# Altium PCB Filter.PcbDoc
Units mm, origin at the board's own origin, x right, y up, seen from the top; angles counter-clockwise.
Board outline 44 x 25 mm, 2 copper layers (Top Layer, Bottom Layer); 40 components, 42 nets, 92 pads, 31 vias.
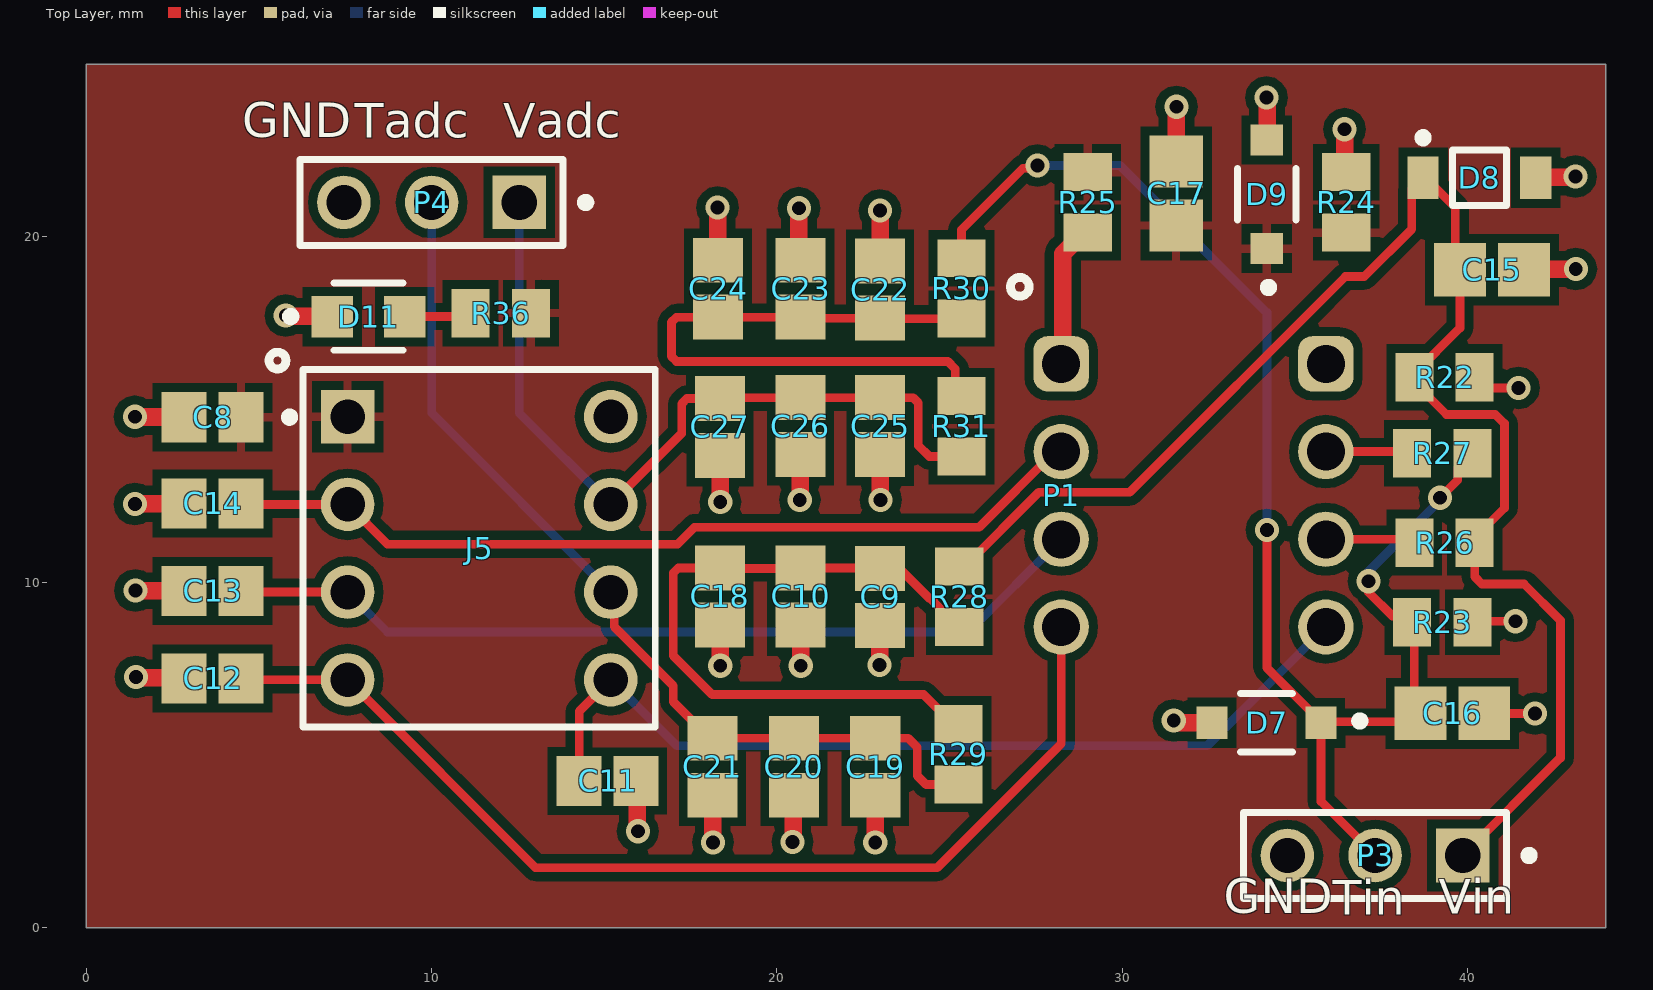
[diagram p0: Top Layer view]
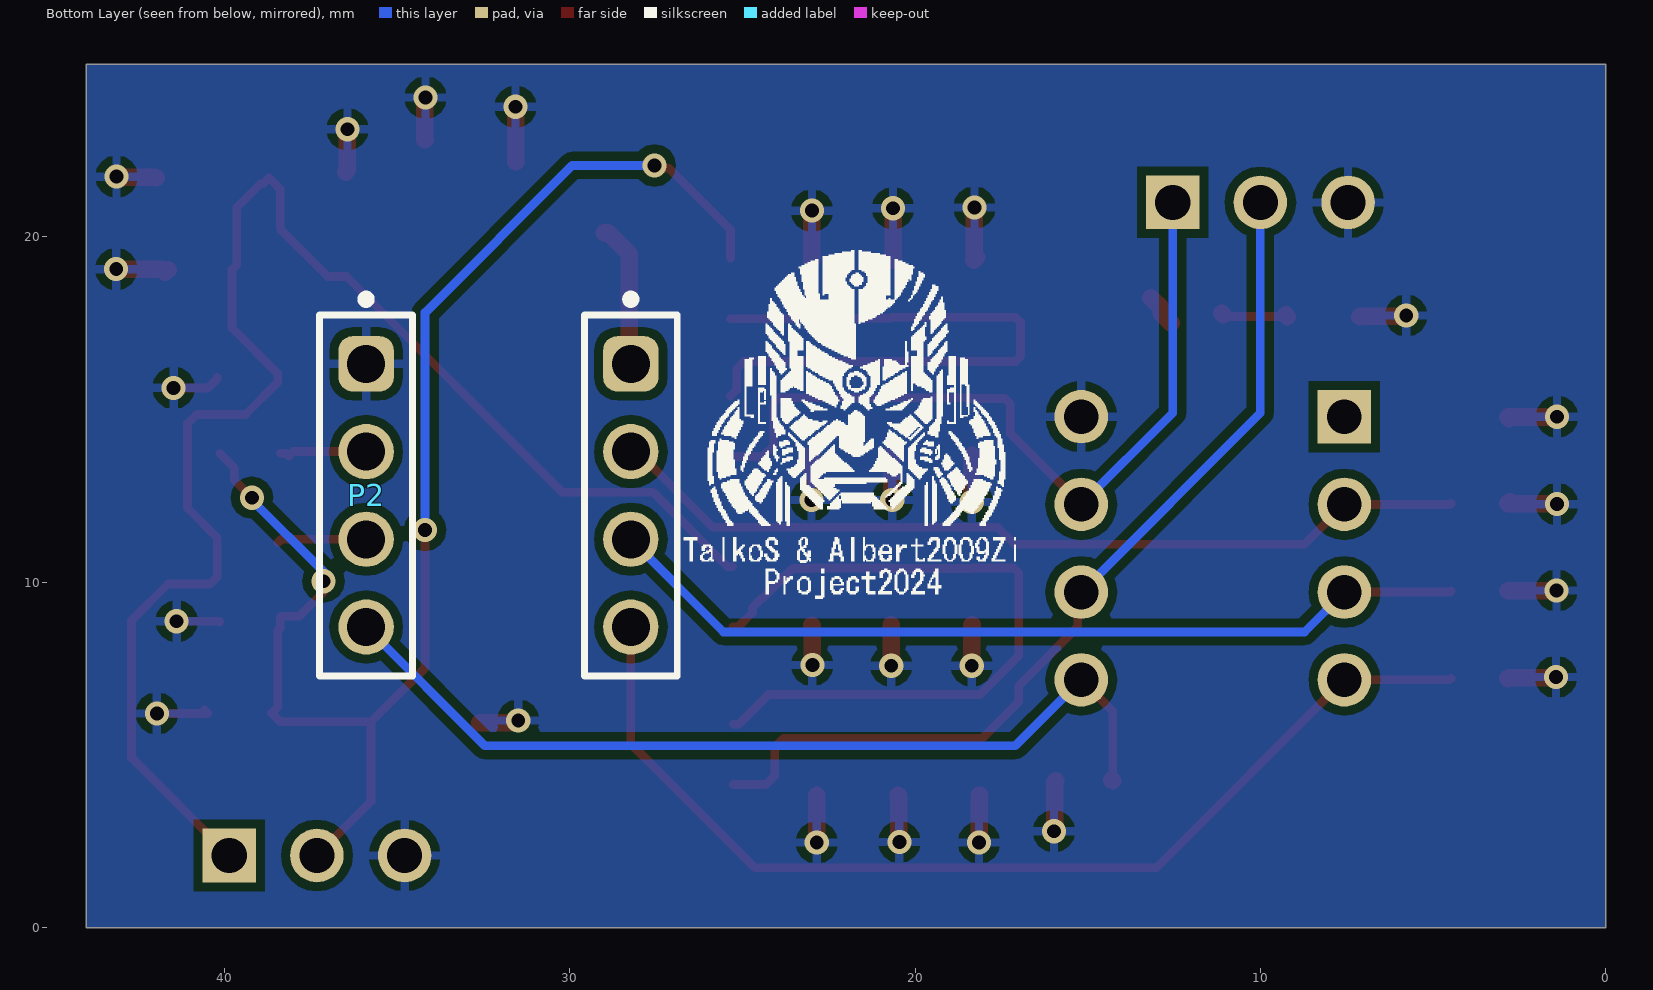
[diagram p1: Bottom Layer view, seen from below]

## Layer stack, top to bottom
Top Solder: solder mask 0.0102, Solder Resist, Dk 3.5
Top Layer: signal copper 0.0356
Dielectric 1: dielectric 0.32, FR-4, Dk 4.8
Bottom Layer: signal copper 0.0356
Bottom Solder: solder mask 0.0102, Solder Resist, Dk 3.5

## Board outline
0,0 0,25 44,25 44,0

## Design rules (kind name [scope] priority, off if disabled: settings)
Clearance [All] p1: gap=0.254 ignorepadtopadclearanceinfootprint=FALSE except(0: Arc-Hole Track-Hole SMDPad-Hole THPad-Hole Via-Hole Fill-Hole Poly-Hole Region-Hole Text-Hole)
MinimumSolderMaskSliver [All] p1: minsoldermaskwidth=0.1
PolygonConnect [All] p1: connectstyle=Relief reliefconductorwidth=0.254 reliefentries=4 polygonreliefangle="90 Angle" airgapwidth=0.254
RoutingVias [All] p1: holewidth=0.711 width=1.27 viastyle="Through Hole" minholewidth=0.4 minwidth=0.7 maxholewidth=0.711 maxwidth=1.27
SilkToSilkClearance [All] p1: silktosilkclearance=0.2
SolderMaskExpansion [All] p1: expansion=0.102 istentingtop=FALSE
Width [All] p1: maxlimit=2 minlimit=0.254 preferedwidth=0.508
28 further rules are at their usual default settings.

## Classes and differential pairs
component class power: C1 C2 C3 C4 C5 D1 D2 D3 D4 IC1 J1 R1 R2 R3
component class uCCtrl: C6 C7 D5 D6 J2 LS1 Q1 Q2 Q3 Q4 Q5 R4 R5 R6 R7 R8 R9 R10 R11 R12 R13 R14 R15 R16 R17 R18 R19 R20 R21 U1 VR1

## Components (designator, comment, footprint, x,y, rotation, side; value= is the part's Value field where it differs from the comment)
C8 "100nF/50V" CAPC2013X145X48NL20T23 3.657,14.779 r0 top
C9 "10uF/16V" CAPC2013X145X48NL20T23 22.99,9.577 r90 top
C10 "1uF/16V" CAPC2013X145X48NL20T23 20.684,9.591 r90 top
C11 "100nF/50V" CAPC2013X145X48NL20T23 15.098,4.25 r0 top
C12 "100nF/50V" CAPC2013X145X48NL20T23 3.657,7.216 r180 top locked
C13 "100nF/50V" CAPC2013X145X48NL20T23 3.657,9.749 r180 top
C14 "100nF/50V" CAPC2013X145X48NL20T23 3.657,12.283 r180 top
C15 "1nF" CAPC2013X145X48ML20T23 40.707,19.055 r180 top
C16 "1nF" CAPC2013X145X48ML20T23 39.559,6.209 r180 top
C17 "1nF" CAPC2013X145X48ML20T23 31.558,21.259 r270 top
C18 "100nF/16V" CAPC2013X145X48NL20T23 18.348,9.592 r90 top
C19 "10uF/16V" CAPC2013X145X48NL20T23 22.847,4.658 r90 top
C20 "1uF/16V" CAPC2013X145X48NL20T23 20.489,4.658 r90 top
C21 "100nF/16V" CAPC2013X145X48NL20T23 18.132,4.658 r90 top
C22 "10uF/16V" CAPC2013X145X48NL20T23 22.99,18.475 r270 top
C23 "1uF/16V" CAPC2013X145X48NL20T23 20.685,18.502 r270 top
C24 "100nF/16V" CAPC2013X145X48NL20T23 18.298,18.502 r270 top
C25 "10uF/16V" CAPC2013X145X48NL20T23 22.99,14.521 r90 top
C26 "1uF/16V" CAPC2013X145X48NL20T23 20.682,14.521 r90 top
C27 "100nF/16V" CAPC2013X145X48NL20T23 18.348,14.498 r90 top
D7 "BZT52C5V1-7-F" FP-SOD123-MFG 34.18,5.934 r180 top
D8 "MMSZ4678T1G" ONSC-SOD-123-2-425-04_V 40.346,21.714 r0 top
D9 "BZT52C5V1-7-F" FP-SOD123-MFG 34.187,21.238 r90 top
D11 "Device ON" FP-LS_R976-MFG 8.169,17.696 r0 top
J5 "1-2199298-2" FP-1-2199298-2-MFG 11.376,10.986 r270 top
P1 "61300411121" 61300411121 28.231,12.516 r270 top
P2 "61300411121" 61300411121 35.897,12.516 r270 bottom
P3 "22-28-4033" MOLX-22-28-4033_V 37.322,2.088 r180 top
P4 "22-28-4033" MOLX-22-28-4033_V 10,21 r180 top
R22 "100K" RESC2013X55X40NL15T20 39.333,15.941 r180 top
R23 "100K" RESC2013X55X40NL15T20 39.262,8.842 r180 top
R24 "100K" RESC2013X55X40NL15T20 36.492,21 r270 top
R25 "0R" RESC2013X55X40NL15T20 29.004,21 r270 top
R26 "0R" RESC2013X55X40NL15T20 39.333,11.142 r180 top
R27 "0R" RESC2013X55X40NL15T20 39.262,13.737 r180 top
R28 "0R" RESC2013X55X40NL15T20 25.282,9.577 r90 top
R29 "0R" RESC2013X55X40NL15T20 25.256,5.015 r90 top
R30 "0R" RESC2013X55X40NL15T20 25.344,18.509 r90 top
R31 "0R" RESC2013X55X40NL15T20 25.344,14.521 r90 top
R36 "360R" RESC2013X55X40NL15T20 11.999,17.796 r0 top

## Footprints (in the part's own frame and the unit in brackets; to place one, negate y for a bottom-side part, rotate by r counter-clockwise, add the part's x,y. Pads: shape width x height; smd on the part's side, far side on the other; paste and mask are expansions set on the pad)
61300411121 [mm] "Pin Header, pitch 2.54 mm, THT, Vertical, single row, 4p"
  rrect50% 1.6x1.6 hole 1.1: 1(-3.81,0)
  round 1.6 hole 1.1: 2(-1.27,0) 3(1.27,0) 4(3.81,0)
  body extent -5.08,-1.27 5.08,1.27, height 8.57
CAPC2013X145X48ML20T23 [mm] "Chip Capacitor, 2-Leads, Body 2.00x1.25mm, IPC Low Density"
  rect 1.5x1.55 smd: 1(-0.925,0) 2(0.925,0)
  body extent -1.1,-0.72 1.1,0.72, height 1.45
CAPC2013X145X48NL20T23 [mm] "Chip Capacitor, 2-Leads, Body 2.00x1.25mm, IPC Medium Density"
  rect 1.3x1.45 smd: 1(-0.825,0) 2(0.825,0)
  body extent -1.1,-0.72 1.1,0.72, height 1.45
FP-1-2199298-2-MFG [mm]
  rect 1.55x1.55 hole 1 paste-1000 mask+0: 1(-3.81,-3.81)
  round 1.55 hole 1 paste-1000 mask+0: 2(-1.27,-3.81) 3(1.27,-3.81) 4(3.81,-3.81) 5(3.81,3.81) 6(1.27,3.81) 7(-1.27,3.81) 8(-3.81,3.81)
  silkscreen extent -5.18,-5.61 5.18,5.1, body extent -5.28,-5.2 5.28,5.2, height 0.25
FP-LS_R976-MFG [mm]
  rect 1.2x1.2 smd paste+0 mask+0: 1(-1.05,0) 2(1.05,0)
  silkscreen extent -2.37,-0.97 1,0.97, body extent -1.75,-0.8 1.75,0.8, height 0.25
FP-SOD123-MFG [mm]
  rect 0.9x0.95 smd paste+0 mask+0: 1(-1.575,0) 2(1.575,0)
  silkscreen extent -2.83,-0.85 0.75,0.85, body extent -2.12,-0.95 2.12,0.95, height 0.25
MOLX-22-28-4033_V [mm] "THD, 3-Leads, Body 7.62x2.49mm, Pitch 2.54mm"
  rect 1.55x1.55 hole 1.02: 1(-2.54,0)
  round 1.55 hole 1.02: 2(0,0) 3(2.54,0)
  silkscreen extent -4.59,-1.24 3.81,1.24, body extent -3.81,-1.24 3.81,1.24, height 8.38
ONSC-SOD-123-2-425-04_V [mm] "SOD, 2-Leads, Body 2.69x1.6mm"
  rect 0.91x1.22 smd: 1(-1.635,0) 2(1.635,0)
  silkscreen extent -1.76,-0.8 0.78,1.28, body extent -1.35,-0.8 1.35,0.8, height 1.35
RESC2013X55X40NL15T20 [mm] "Chip Resistor, 2-Leads, Body 2.00x1.25mm, IPC Medium Density"
  rect 1.1x1.4 smd: 1(-0.875,0) 2(0.875,0)
  body extent -1.07,-0.7 1.08,0.7, height 0.55

## Part data
C8 C9 C10 C11 C12 C13 C14 C18 C19 C20 C21 C22 C23 C24 C25 C26 C27: library part CMP-2007-03167-1, Manufacturer=Vitramon, Part Number=VJ0805Y104KNAAT
C15 C16 C17: library part CMP-2007-03154-1, Manufacturer=Vitramon, Part Number=VJ0805Y102KXAMC
D7 D9: library part CMP-2000-05976-2, "DIODE ZENER 5.1V 500MW SOD123", Forward Current=10mA, Manufacturer="Diodes Incorporated", Max Junction Temp=+150°C, Max Reverse Leakage Current=2uA, Max Zener Voltage=5.4V, Nom Zener Voltage=5.1V, Package=SOD123, Power Dissipation=370mW, Temperature="-65°C to +150°C", Temperature Range Low=-65°C, Automotive=No, Automotive Grade=NA, Category=Diode, ComponentLink2Description=Datasheet, ComponentLink2URL=https://www.diodes.com/assets/Datasheets/ds18004.pdf, Device Class L1="Discrete Semiconductors", Device Class L2=Diodes, Device Class L3="Zener Diodes", Digikey Description="DIODE ZENER 5.1V 500MW SOD123", Footprint Url=https://www.diodes.com/assets/Package-Files/SOD123.pdf, Height=1.45mm, Lead Free=Yes, Manufacturer Part Number=BZT52C5V1-7-F, Mouser Description="Zener Diodes 5.1V 500mW", Octopart=https://octopart.com/bzt52c5v1-7-f-diodes+inc.-326718, RoHS=TRUE, Standoff Height=0mm, Temperature Range High=+150°C, Zener Impedance=60Ω
D8: library part CMP-1060-00511-1, "Zener Voltage Regulator, 500 mW, 2-Pin SOD-123, Pb-Free, Tape and Reel", Manufacturer="On Semiconductor", ComponentLink1Description="Manufacturer URL", ComponentLink1URL=http://www.onsemi.com/, ComponentLink2Description=Datasheet, ComponentLink2URL=http://www.onsemi.com/pub_link/Collateral/MMSZ4678T1-D.PDF, ComponentLink3Description="Package Specification", ComponentLink3URL=http://www.onsemi.com/pub_link/Collateral/425-04.PDF, DatasheetVersion="Rev. 9", Mounting Technology="Surface Mount", P Max (W)=0.5, PackageDescription="2-Pin SOD, Body 1.6 x 2.69 mm", PackageReference=SOD-123-2-425-04, PackageVersion="Rev. G, 10/2009", Packing="Tape and Reel", PartNumber=MMSZ4678T1G, RoHS=Pb-Free, VZ Typ (V)=1.8
D11: library part CMP-62016-000037-1, "LED RED DIFFUSED 0805 SMD", Case Code (Imperial)=0805, Case Code (Metric)=2012, Color=Red, Forward Current=25mA, Forward Voltage=2.5V, Lens Color=White, Max Operating Temperature=85°C, Min Operating Temperature=-30°C, Package Quantity=16000, Power Dissipation=65W, Reverse Voltage=12V, Test Current=20mA, Case/Package=0805, Depth=1.35mm, Dominant Wavelength=633nm, Height=0.9mm, Illumination Color=Red, Length=2mm, Lens Size=1.25mm, Lens Style=Flat, Lens Transparency=Diffused, Luminous Flux=0.47lm, Luminous Intensity=180mcd, Mount="Surface Mount", Number of Elements=1, Number of LEDs=1, Number of Pins=2, Packaging="Tape and Reel", Radiation Hardening=No, Viewing Angle=160°, Width=1.25mm
J5: library part CMP-03370-000009-1, "CONN IC DIP SOCKET 8POS TIN", Color=Black, Contact Current Rating=1A, Contact Resistance=20mR, Flammability Rating="UL94 V-0", Insulation Resistance=1GR, Max Operating Temperature=105°C, Min Operating Temperature=-40°C, Package Quantity=60, Connector Type=Pin, Contact Finish - Mating=TIN, Contact Material=Bronze, Contact Plating=Tin, Contact Post Length=3inch, ELV=Compliant, Housing Material=PBT, Lead Free="Lead Free", Lead Pitch=2.54mm, Length=0.4inch, Mating Alignment="Yes (With)", Mount="Through Hole", Number of Contacts=8, Number of Positions=8, Number of Rows=2, Orientation=Straight, Packaging=Rail/Tube, Pitch=2.54mm, Radiation Hardening=No, RoHS Compliant=Yes, Row Spacing=0.3inch, Series="Diplomate DL", Termination="Through Hole"
P1 P2: library part CMP-1502-01064-3, Color=Black, Contact Resistance=20mΩ, Current Rating=3A, Max Operating Temperature=105°C, Min Operating Temperature=-40°C, Operating Supply Voltage=250V, Connector Type="Male Pin", Contact Material=Copper, Contact Mating Length=5.9944mm, Contact Plating=Gold, Gender=Male, Height=8.89mm, Lead Free="Lead Free", Lead Pitch=2.54mm, Mount="Through Hole", NexarPartId=32855522, Number of Contacts=4, Number of Pins=4, Number of Positions=4, Number of Rows=1, Orientation=Vertical, Packaging=Bulk, Pitch=2.54mm, REACH SVHC=Unknown, RoHS=Compliant, Termination=Solder, Voltage Rating=250V
P3 P4: library part CMP-1676-00001-5, "Male Header, Pitch 2.54 mm, 1 x 3 Position, Height 8.38 mm, Tail Length 3.18 mm, RoHS, Bulk", Colour=Black, Current Rating="4 A", Manufacturer=Molex, Max Operating Temperature="75 degC", Min Operating Temperature="0 degC", Package Quantity=1, Voltage Rating="250 V", ComponentLink1Description="Manufacturer URL", ComponentLink1URL=http://www.molex.com/, ComponentLink2Description=Datasheet, ComponentLink2URL=http://www.molex.com/pdm_docs/sd/022284033_sd.pdf, Contact Finish=Gold, Contact Material=Brass, Contact Plating=Gold, DatasheetVersion="Rev. G, 01/2012", Height="8.38 mm", Lead Pitch="0.1 inch", Length="7.62 mm", Mount="Through Hole", Mounting Technology="Through Hole", PackageDescription="Male Header, Pitch 2.54 mm, 1 x 3 Position, Height 8.38 mm, Tail Length 3.18 mm", PackageReference=22-28-4033, Packaging=Bulk, Pins=3, REACH SVHC=Unknown, RoHSCompliant=true, Rows=1
R22 R23 R24 R25 R26 R27 R28 R29 R30 R31 R36: library part CMP-2001-04755-1, Manufacturer="Vishay Dale", Part Number=TNPW08052K00BEEN

## Via types
v1: diameter 0.7, hole 0.4, Top Layer to Bottom Layer, 31 vias

## Nets (pads, with @x,y where several pads share a name; then routed paths per layer and width w, separated by ;. In a path a pad name is that pad's centre, name@x,y a point inside that pad or via, vN(x,y) a via of type N, cw(c..) or ccw(c..) an arc to the next point about the centre after c; other vN are vias at no path point)
+5V: 
+5V_Device: P1.1 R25.2 | length 4.2
  Top Layer w0.508: P1.1 28.273,16.368 28.273,19.519 28.879,20.125 R25.2
+5V_Device_P: C8.2 C17.2 D9.1 J5.1 R24.2 R25.1 R36.2 | length 1
  Top Layer w0.508: R36.2@12.578,17.5 R36.2 12.874,17.946 R36.2@13.17,18.242
+Vin: 
debugSW: 
GND: 
GND_Device: C8.1 C9.1 C10.1 C11.2 C12.2 C13.2 C14.2 C15.1 C16.1 C17.1 C18.1 C19.1 C20.1 C21.1 C22.1 C23.1 C24.1 C25.1 C26.1 C27.1 D7.2 D8.2 D9.2 D11.1 J5.8 P2.1 P3.3 P4.3 R22.1 R23.1 R24.1 | length 37.3
  Top Layer w0.254: R23.1 40.137,8.857 40.153,8.873 v1(41.385,8.873) ; R22.1 40.208,15.894 40.472,15.63 v1(41.472,15.63) ; C16.1@40.673,6.202 40.575,6.3 C16.1 40.491,6.201 v1(41.957,6.201)
  Top Layer w0.508: v1(1.408,12.263) 1.417,12.273 2.822,12.273 C14.2 C14.2@2.783,12.332 ; v1(1.408,14.795) 1.416,14.787 2.824,14.787 C8.1 C8.1@2.795,14.742 ; v1(1.423,9.761) 1.429,9.755 2.826,9.755 C13.2 ; v1(1.438,7.259) 1.459,7.238 2.811,7.238 C12.2 C12.2@2.82,7.204 ; v1(5.777,17.724) 5.791,17.71 7.105,17.71 D11.1 ; C11.2 15.951,4.223 15.951,2.818 v1(15.978,2.791) ; C21.1 18.139,3.825 18.139,2.472 v1(18.146,2.465) ; v1(18.281,20.852) 18.281,19.486 18.21,19.415 C24.1 ; C18.1 18.353,8.762 18.353,7.585 v1(18.357,7.581) ; C27.1 18.353,13.667 18.353,12.333 v1(18.359,12.328) ; v1(20.455,2.481) 20.472,2.498 20.472,3.815 C20.1 ; v1(20.637,20.834) 20.637,19.411 20.664,19.385 20.646,19.367 C23.1 ; v1(20.663,12.386) 20.672,12.395 20.672,13.687 C26.1 ; C10.1 20.686,8.764 v1(20.688,7.581) v1(20.688,7.581) ; v1(22.846,2.465) C19.1 ; v1(22.975,7.603) 22.982,7.611 22.982,8.744 C9.1 ; v1(22.984,20.763) 22.987,20.76 22.987,19.302 C22.1 ; C25.1 22.996,13.69 22.996,12.392 v1(23.002,12.386) ; v1(31.493,5.996) 31.545,5.996 31.608,5.934 D7.2 ; C17.1 31.569,22.196 v1(31.569,23.77) ; v1(34.175,24.036) 34.193,24.018 34.193,22.819 D9.2 ; v1(36.439,23.122) 36.439,21.928 R24.1 ; C15.1 41.714,18.974 41.81,19.069 v1(43.136,19.069) ; D8.2 41.998,21.731 43.108,21.731 v1(43.125,21.748)
GP0: C25.2 C26.2 C27.2 J5.7 P4.1 R31.1 | length 23.2
  Top Layer w0.254: J5.7 17.242,14.312 17.242,15.174 17.391,15.323 C27.2 ; C27.2@18.372,15.346 C26.2 ; C26.2@20.685,15.346 C25.2 23.947,15.346 24.096,15.197 24.096,13.963 24.412,13.646 R31.1
  Bottom Layer w0.254: P4.1 12.54,14.903 J5.7
GP1: C19.2 C20.2 C21.2 J5.6 P4.2 R29.1 | length 27.1
  Top Layer w0.254: J5.6 15.291,9.612 15.291,8.709 17,7 17,6.539 18.057,5.483 C21.2 ; C21.2@18.14,5.483 C19.2 23.804,5.483 24.064,5.223 24.064,4.4 24.324,4.14 R29.1
  Bottom Layer w0.254: P4.2 10,14.903 J5.6
GP2: C11.1 J5.5 P2.4 | length 26.3
  Top Layer w0.254: C11.1 14.273,6.263 J5.5
  Top Layer w0.508: C11.1 C11.1@14.298,4.274
  Bottom Layer w0.254: J5.5 17.097,5.265 32.457,5.265 P2.4
GP3: C12.1 J5.4 P1.4 | length 30.9
  Top Layer w0.254: C12.1 4.522,7.176 J5.4 13.009,1.734 24.639,1.734 28.231,5.326 P1.4
GP4: C13.1 J5.3 P1.3 | length 25.4
  Top Layer w0.254: C13.1 4.514,9.716 J5.3
  Top Layer w0.508: J5.3@7.55,9.733 J5.3
  Bottom Layer w0.254: J5.3 8.722,8.56 25.546,8.56 P1.3
GP5: C14.1 J5.2 P1.2 | length 25.4
  Top Layer w0.254: C14.1 4.509,12.256 J5.2 8.722,11.1 17.118,11.1 17.615,11.597 25.859,11.597 28.048,13.786 P1.2
hlLEDs: 
NetC6_2: 
NetC9_2: C9.2 C10.2 C18.2 R28.1 R29.2 | length 20.6
  Top Layer w0.254: R29.2 25.106,5.89 24.248,6.748 18.127,6.748 17,7.875 17,10.268 17.149,10.417 C18.2 18.363,10.402 20.669,10.402 C10.2 22.99,10.416 C9.2 23.543,10.402 24.424,9.521 24.45,9.521 24.709,9.261 24.709,9.125 25.132,8.702 R28.1
NetC22_2: C22.2 C23.2 C24.2 R30.1 R31.2 | length 18.7
  Top Layer w0.254: R31.2 25.166,15.574 25.166,16.178 24.947,16.398 17.092,16.398 16.943,16.546 16.943,17.529 17.092,17.677 C24.2 C23.2 20.713,17.65 C22.2 23.005,17.634 R30.1
NetD1_1: 
NetD1_2: 
NetD2_2: 
NetD4_2: 
NetD5_2: 
NetD6_2: 
NetD11_2: D11.2 R36.1 | length 2
  Top Layer w0.254: D11.2 11.024,17.696 R36.1@11.074,17.746
  Top Layer w0.508: D11.2 D11.2@9.269,17.746 ; R36.1@11.074,17.746 R36.1
NetLS1_2: 
NetQ1_1: 
NetQ1_3: 
NetQ2_1: 
NetQ2_3: 
NetQ3_1: 
NetQ3_3: 
NetQ4_1: 
NetQ5_1: 
NetQ5_3: 
sound: 
tempMeas/ICSPDAT: 
Tmp_Check: P2.2 R27.2 | length 2.6
  Top Layer w0.254: P2.2 38.005,13.786 38.137,13.653 38.22,13.737 R27.2
Tmp_Check_P: C16.2 D7.1 P3.2 R23.2 R27.1 R30.2 | length 41.6
  Top Layer w0.254: R30.2 25.344,20.207 27.126,21.989 27.458,21.989 v1(27.543,22.074) ; v1(34.19,11.516) 34.19,7.524 35.755,5.959 D7.1 35.756,5.932 35.756,3.654 P3.2 ; D7.1@35.755,5.959 38.385,5.959 C16.2 38.458,6.384 38.458,8.616 38.387,8.687 38.387,8.992 38.361,9.017 37.829,9.017 37.128,9.718 v1(37.128,10.029) ; v1@39.432,12.679 39.714,12.961 39.714,13.314 R27.1
  Bottom Layer w0.254: v1(27.543,22.074) 29.926,22.074 34.19,17.81 v1(34.19,11.516) ; v1(37.128,10.029) 37.128,10.305 39.205,12.381 v1(39.205,12.451)
V_Check: P2.3 R26.2 | length 2.6
  Top Layer w0.254: P2.3 38.354,11.246 R26.2
V_Check_P: C15.2 D8.1 P3.1 R22.2 R26.1 R28.2 | length 44.5
  Top Layer w0.254: R28.2 25.432,10.452 27.585,12.605 30.213,12.605 36.464,18.856 37.012,18.856 38.383,20.227 38.383,21.386 D8.1 38.884,21.541 38.956,21.541 39.643,20.854 39.643,19.195 C15.2 39.782,17.368 R22.2@38.458,16.044 ; R22.2 38.458,15.791 39.389,14.86 40.803,14.86 41.068,14.595 41.068,12.152 40.208,11.292 R26.1 40.208,10.16 40.416,9.952 41.636,9.952 42.688,8.9 42.688,4.914 P3.1
voltMeas/ICSPCLK: 
Vpp/MCLR: 

## Polygon pours and split planes (outlines as drawn)
GND_Device on Bottom Layer "GND_Device" (solid, pour order 0): 0,25 44,25 44,0 0,0
+5V_Device_P on Top Layer "+5V_Device_P" (solid, pour order 1): 0,25 44,25 44,0 0,0

## Silkscreen, mask and mechanical layers (free items; w line width, h text height)
Top Overlay:
  circle w0.254: c27.033,18.557 r0.273
  circle w0.254: c5.537,16.42 r0.245
  text "GND" at 4.509,22.895 h1
  text "Tadc" at 7.772,22.877 h1
  text "Vadc" at 12.069,22.877 h1
  text "GND" at 32.936,0.421 h1
  text "Vin" at 39.172,0.4 h1
  text "Tin" at 36.096,0.379 h1
Bottom Overlay:
  drawing of 106 lines, arcs and shapes, not listed
Mechanical 1:
  lines w0.254: 0,0 0,25 44,25 44,18.75 44,6.25 44,0 0,0